# Altium PCB Brd_3_Golden_Arduino_Layout.PcbDoc
Units mil, origin at the board's own origin, x right, y up, seen from the top; angles counter-clockwise.
Board outline 2750 x 2700 mil, 2 copper layers (Top Layer, Bottom Layer), stack 61.756 mil thick; 49 components, 41 nets, 223 pads, 60 vias.
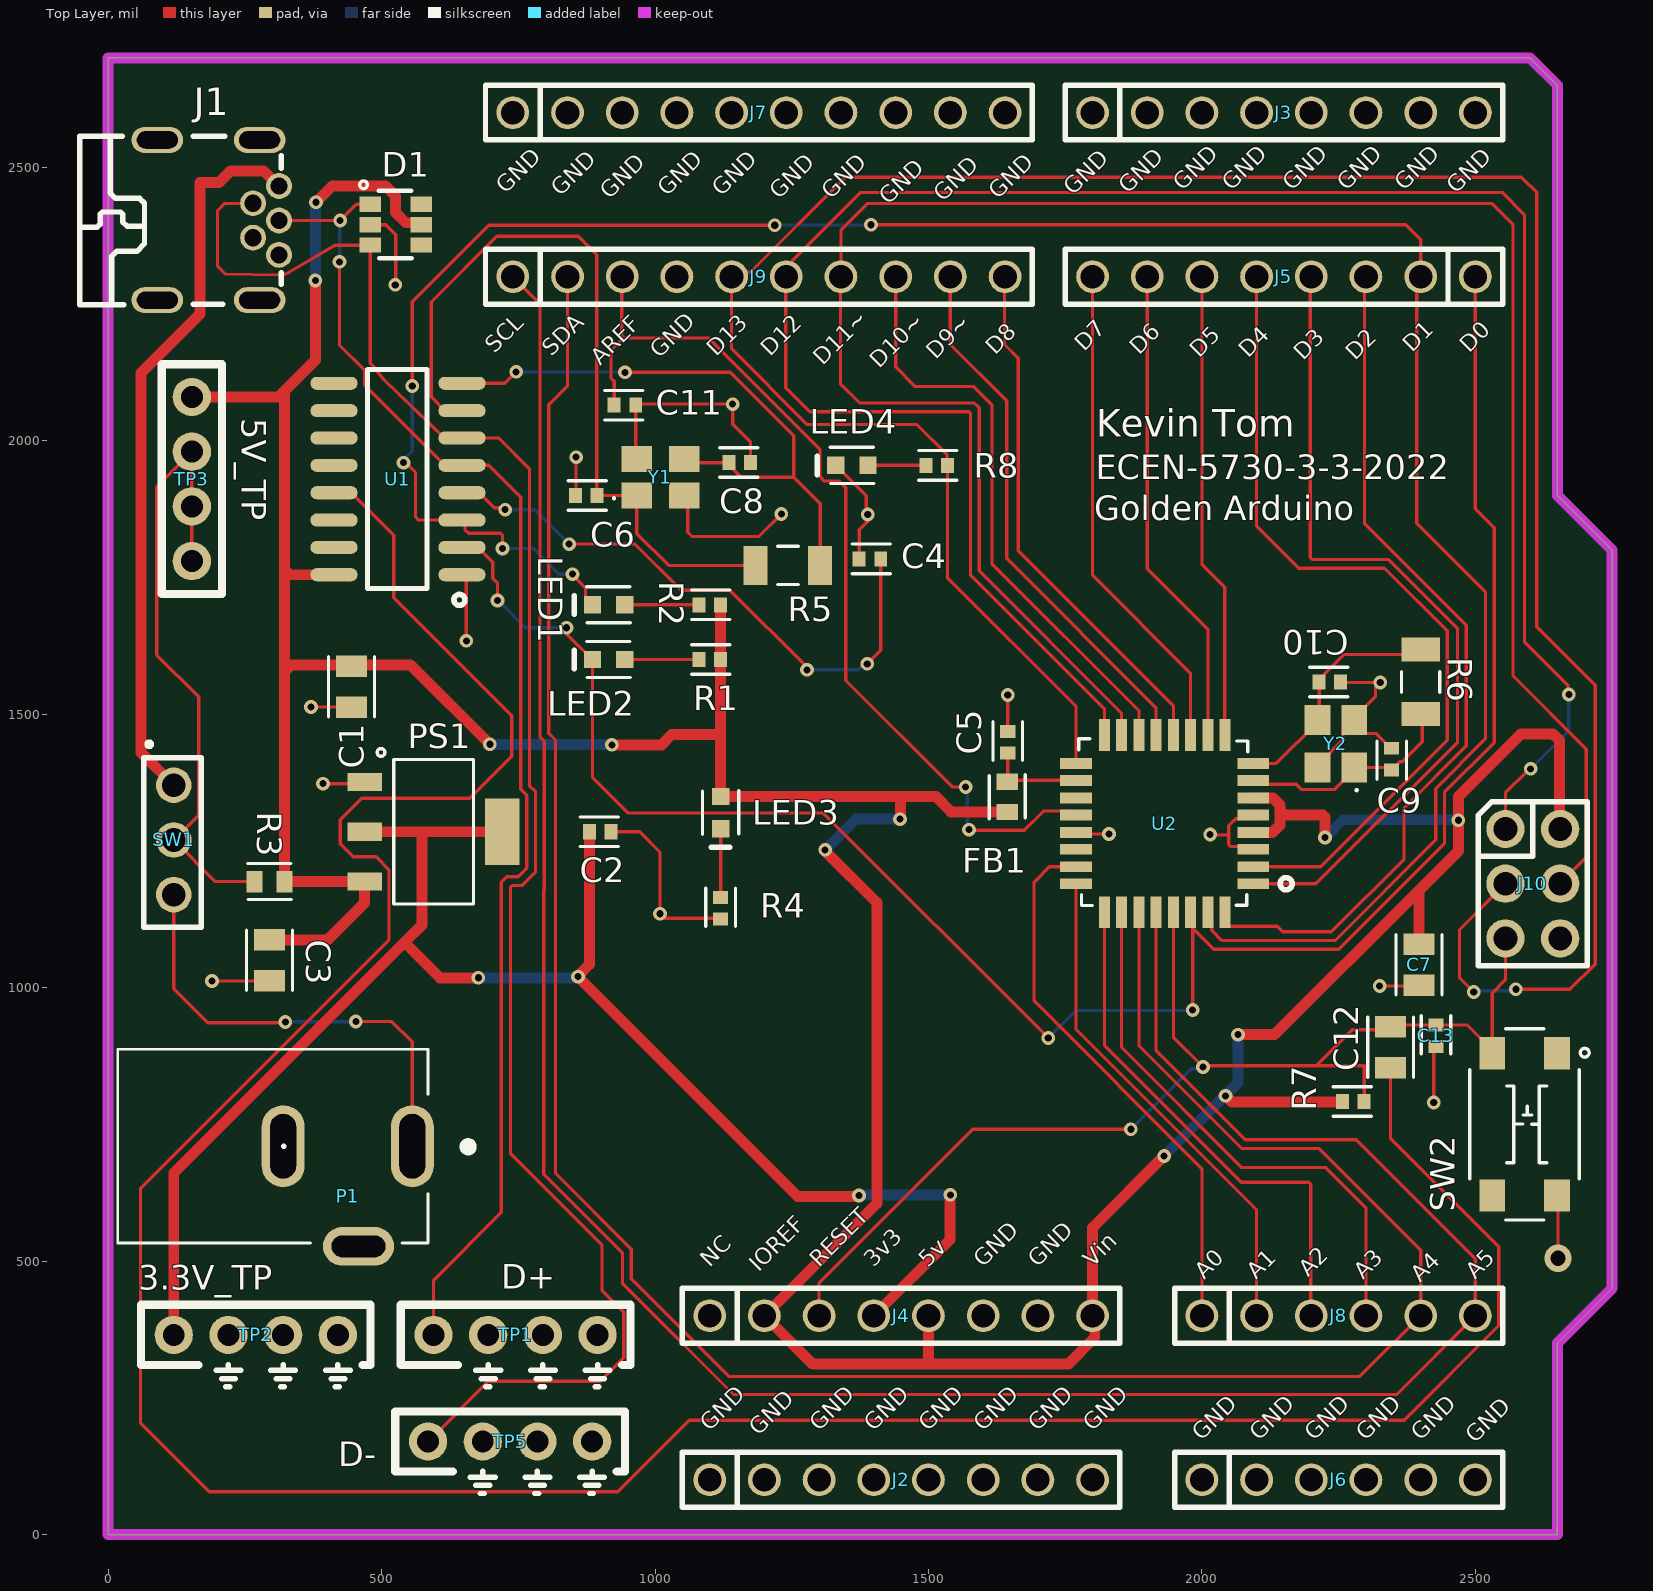
[diagram p0: Top Layer view]
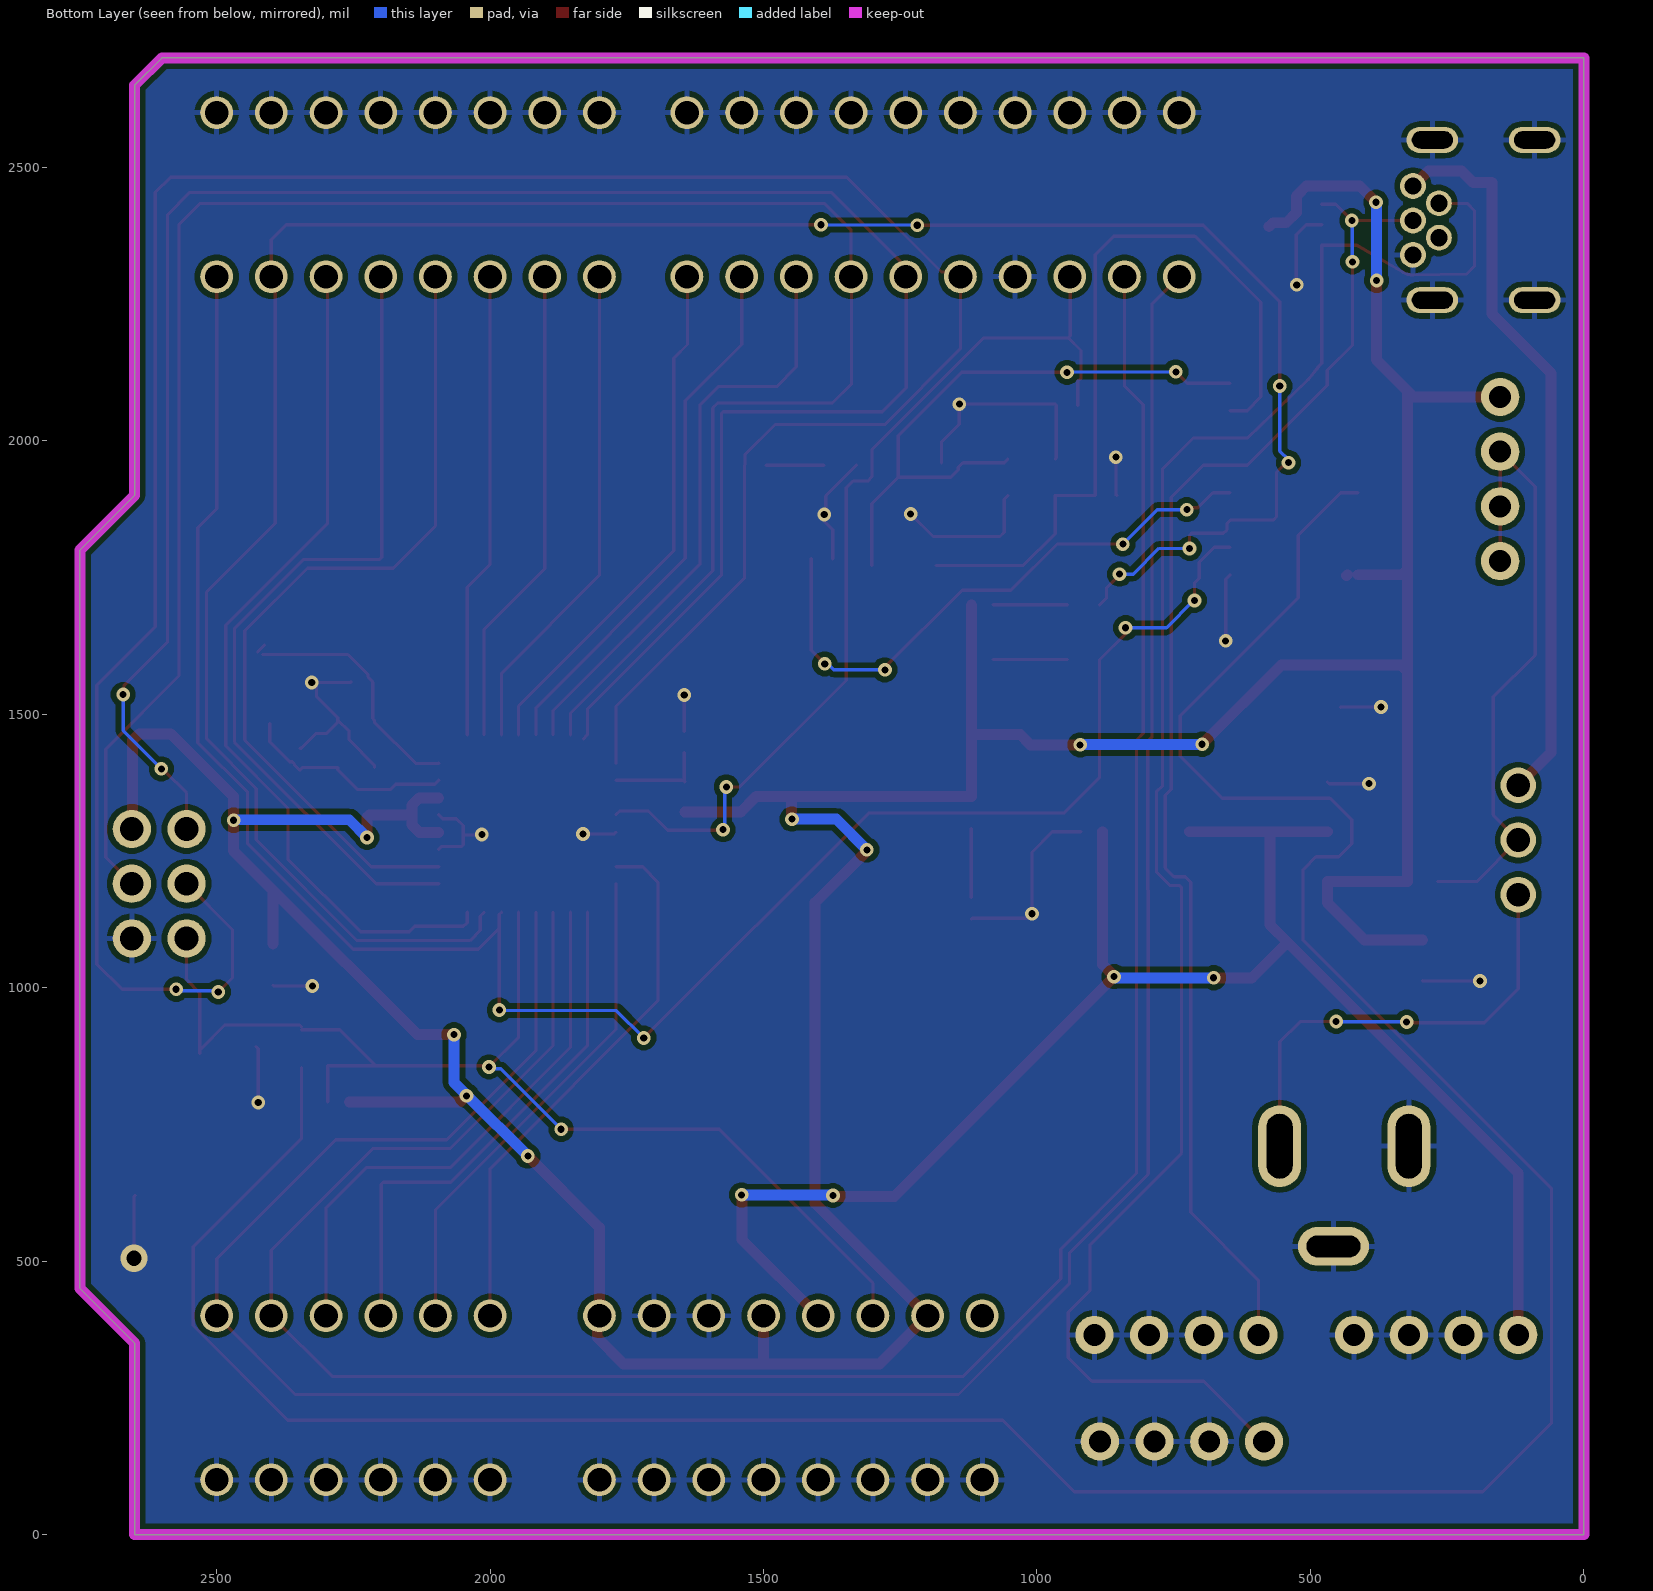
[diagram p1: Bottom Layer view, seen from below]
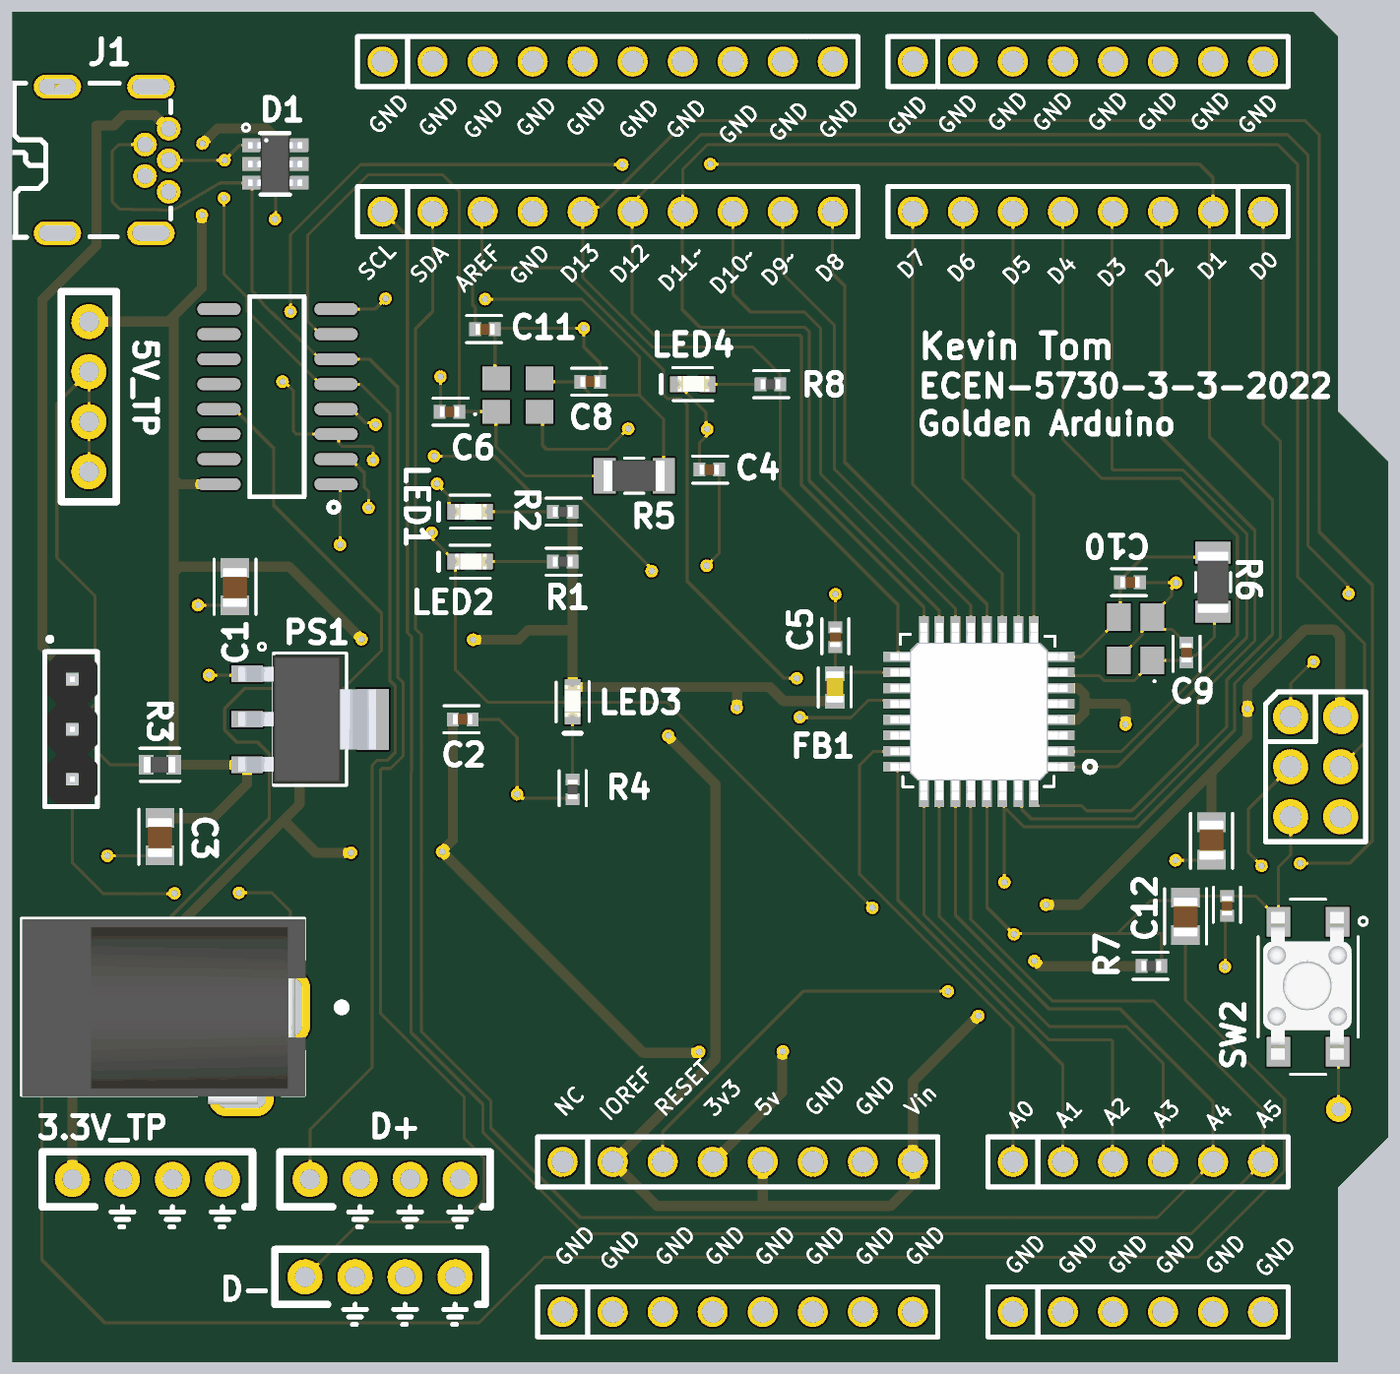
[diagram p2: 3D render of the assembled board from above, using the file's embedded part models]

## Layer stack, top to bottom
Top Solder: solder mask 1, SM-001, Dk 4
Top Layer: signal copper 1.378
Dielectric 1: core 59, Core-043, Dk 4.3
Bottom Layer: signal copper 1.378
Bottom Solder: solder mask 1, SM-001, Dk 4

## Board outline
0,0 0,2700 2600,2700 2650,2650 2650,1900 2750,1800 2750,450 2650,350 2650,0

## Design rules (kind name [scope] priority, off if disabled: settings)
BoardOutlineClearance [All] p1: gap=10 ignorepadtopadclearanceinfootprint=FALSE except(0: Arc-SplitContinuation Track-SplitContinuation SMDPad-SplitContinuation THPad-SplitContinuation Via-SplitContinuation Fill-SplitContinuation Poly-SplitContinuation Region-SplitContinuation Text-SplitContinuation)
Clearance [All] p1: gap=10 ignorepadtopadclearanceinfootprint=FALSE except(0: Arc-Hole Track-Hole SMDPad-Hole THPad-Hole Via-Hole Fill-Hole Poly-Hole Region-Hole Text-Hole)
PlaneClearance [All] p1: clearance=10
PlaneConnect [All] p1: planeconnectstyle=Direct reliefexpansion=20 reliefentries=4 reliefconductorwidth=10 reliefairgap=10
PolygonConnect [All] p1: thpad.connectstyle=Relief thpad.reliefconductorwidth=10 thpad.reliefentries=4 thpad.polygonreliefangle="90 Angle" thpad.airgapwidth=10 smdpad.connectstyle=Direct smdpad.reliefconductorwidth=10 smdpad.reliefentries=4 smdpad.polygonreliefangle="90 Angle" smdpad.airgapwidth=10 via.connectstyle=Direct via.reliefconductorwidth=10 via.reliefentries=4 via.polygonreliefangle="90 Angle" via.airgapwidth=10
RoutingVias [All] p1: holewidth=13 width=25 viastyle="Through Hole" minholewidth=13 minwidth=25 maxholewidth=60 maxwidth=80
SolderMaskExpansion [All] p1: expansion=4 istentingtop=FALSE
UnRoutedNet [All] p1: checkbadconnections=TRUE
Width "Schematic Width Constraint_1" [InNet('POWER_3.3V')] p1: maxlimit=20 minlimit=20 preferedwidth=20 minimp=50.000000 maximp=50.000000 favimp=50.000000
Width "Schematic Width Constraint" [InNet('+5')] p2: maxlimit=20 minlimit=20 preferedwidth=20 minimp=50.000000 maximp=50.000000 favimp=50.000000
Width [All] p3: maxlimit=100 minlimit=6 preferedwidth=6 minimp=50.000000 maximp=50.000000 favimp=50.000000
27 further rules are at their usual default settings.

## Components (designator, comment, footprint, x,y, rotation, side; value= is the part's Value field where it differs from the comment)
C1 "22uF" 0805_Passive_Capaciitor 445,1550 r90 top
C2 "10uF" 0402_Passive_Capacitor 900,1285 r180 top
C3 "22uF" 0805_Passive_Capaciitor 295,1050 r90 top
C4 "1uF" 0402_Passive_Capacitor 1393,1784 r0 top
C5 "10uF" 0402_Passive_Capacitor 1645,1449 r90 top
C6 "22pF" 0402_Passive_Capacitor 874,1900 r0 top
C7 "22uF" 0805_Passive_Capaciitor 2397,1042 r270 top
C8 "22pF" 0402_Passive_Capacitor 1155,1960 r180 top
C9 "22pF" 0402_Passive_Capacitor 2347,1418 r270 top
C10 "22pF" 0402_Passive_Capacitor 2234,1559 r180 top
C11 "10uF" 0402_Passive_Capacitor 945,2065 r180 top
C12 "22uF" 0805_Passive_Capaciitor 2345,891 r90 top
C13 "1uF" 0402_Passive_Capacitor 2428,912 r90 top
D1 "SRV05-4-P-T7" TVS 525,2395 r0 top value="TVS DIODE 5.5V 6TSOP"
FB1 "FB_10uH_0603" 0603_PASSIVE_Capacitor 1644,1349 r90 top
J1 "USB Mini" USB_MINI_B 201.25,2403.55 r270 top value="USB mini B"
J2 "PPTC081LFBN-RC" 8_PIN_ARDUINO_100MIL 1100,100 r0 top value=Female
J3 "PPTC081LFBN-RC" 8_PIN_ARDUINO_100MIL 1800,2600 r0 top value=Female
J4 "PPTC081LFBN-RC" 8_PIN_ARDUINO_100MIL 1100,400 r0 top value=Female
J5 "PPTC081LFBN-RC" 8_PIN_ARDUINO_100MIL 2500,2300 r180 top value=Female
J6 "PPTC061LFBN-RC" 6_PIN_ARDUINO_100mil 2000,100 r0 top value=Female
J7 "PPTC101LFBN-RC" 10_PIN_ARDUINO_100MIL 740,2600 r0 top value=Female
J8 "PPTC061LFBN-RC" 6_PIN_ARDUINO_100mil 2000,400 r0 top value=Female
J9 "PPTC101LFBN-RC" 10_PIN_ARDUINO_100MIL 740,2300 r0 top value=Female
J10 "NRPN032PAEN-RC" ICSP 2555,1290 r0 top
LED1 "KT-0603R" LED_0603 915,1700 r180 top value=Green
LED2 "KT-0603R" LED_0603 915,1600 r180 top value=Green
LED3 "KT-0603R" LED_0603 1120,1320 r270 top value=Red
LED4 "KT-0603R" LED_0603 1360,1955 r180 top value=Blue
P1 "Power Jack" Power_Jack 556.22,710 r180 top value="CONN PWR JACK 2X5.5MM SOLDER"
PS1 "AMS1117-3.3" LDO 595,1285 r270 top value="IC REG LINEAR 3.3V 800MA SOT223"
R1 "1k" 0402_Passive_Resistor 1100,1600 r0 top value="1K Ohm"
R2 "1k" 0402_Passive_Resistor 1100,1700 r0 top value="1K Ohm"
R3 "500m" 0603_PASSIVE_Resistor 295,1194 r0 top value="500 mOhm"
R4 "1k" 0402_Passive_Resistor 1120,1145 r90 top value="1K Ohm"
R5 "1M" 1206_Passive_Resitor 1243,1772 r0 top value="1M Ohm"
R6 "1M" 1206_Passive_Resitor 2400,1559 r90 top value="1M Ohm"
R7 "10k" 0402_Passive_Resistor 2277,792 r180 top value=10KOhm
R8 "1k" 0402_Passive_Resistor 1515,1955 r0 top value="1K Ohm"
SW1 "PREC003SAAN-RC" 3_PIN_100mil 120,1370 r270 top value="CONN HEADER VERT 3POS 2.54MM"
SW2 "TL3305AF160QG" Switch_JLC 2590,750 r270 top
TP1 "D+" TP10x_Probe 745,365 r0 top
TP2 "3.3V_TP" TP10x_Probe 270,365 r0 top
TP3 "5V_TP" TP10x_Floating 153,1930 r270 top
TP5 "D-" TP10x_Probe 735,170 r0 top
U1 "CH340G" "USB to serial" 530,1930 r90 top value="USB to Serial"
U2 "ATMEGA328P-ANR" ATMega328P 1930,1300 r0 top value="IC MCU 8BIT 32KB FLASH 32TQFP"
Y1 "X322512MSB4SI" "Crystal resonator" 1010,1935 r0 top value=12MHz
Y2 "X322516MLB4SI" "Crystal resonator" 2243,1446 r90 top value=16MHz

## Footprints (in the part's own frame and the unit in brackets; to place one, negate y for a bottom-side part, rotate by r counter-clockwise, add the part's x,y. Pads: shape width x height; smd on the part's side, far side on the other; paste and mask are expansions set on the pad)
3_PIN_100mil [mm]
  round 1.65 hole 1.1: 1(0,0) 2(2.54,0) 3(5.08,0)
  silkscreen extent -2,-1.4 6.6,1.27, body extent -1.14,-1.27 6.48,1.27, height 8.38
6_PIN_ARDUINO_100mil [mil]
  round 60 hole 43.31: 1(0,0) 2(100,0) 3(200,0) 4(300,0) 5(400,0) 6(500,0)
  silkscreen extent -50,-50 550,50
8_PIN_ARDUINO_100MIL [mil]
  round 60 hole 43.31: 1(0,0) 2(100,0) 3(200,0) 4(300,0) 5(400,0) 6(500,0) 7(600,0) 8(700,0)
  silkscreen extent -50,-50 750,50
10_PIN_ARDUINO_100MIL [mil]
  round 60 hole 43.31: 1(0,0) 2(100,0) 3(200,0) 4(300,0) 5(400,0) 6(500,0) 7(600,0) 8(700,0) 9(800,0) 10(900,0)
  silkscreen extent -50,-50 950,50
0402_Passive_Capacitor [mm] "Reference: https://www.worthingtonassembly.com/perfect-0402-footprint"
  rect 0.6x0.7 smd mask+0: 1(-0.5,0) 2(0.5,0)
  silkscreen extent -0.84,-0.69 0.94,0.69, body extent -0.5,-0.27 0.5,0.28, height 0.5
0402_Passive_Resistor [mm] "Reference: https://www.worthingtonassembly.com/perfect-0402-footprint"
  rect 0.6x0.7 smd mask+0: 1(-0.5,0) 2(0.5,0)
  silkscreen extent -0.84,-0.69 0.94,0.69, body extent -0.49,-0.25 0.51,0.25, height 0.4
0603_PASSIVE_Capacitor [mm] "Reference: http://livepartlibrary.com/fpdimensions.html"
  rect 0.75x1 smd mask+0: 1(-0.7,0) 2(0.7,0)
  silkscreen extent -1.02,-0.84 1.02,0.84, body extent -0.79,-0.45 0.81,0.45, height 0.79
0603_PASSIVE_Resistor [mm] "Reference: http://livepartlibrary.com/fpdimensions.html"
  rect 0.75x1 smd mask+0: 1(-0.7,0) 2(0.7,0)
  silkscreen extent -1.02,-0.84 1.02,0.84, body extent -0.81,-0.4 0.79,0.4, height 0.55
0805_Passive_Capaciitor [mm] "Reference: http://livepartlibrary.com/fpdimensions.html"
  rect 1x1.45 smd mask+0: 1(-0.95,0) 2(0.95,0)
  silkscreen extent -1.4,-1.07 1.4,1.07, body extent -1.04,-0.62 0.96,0.63, height 1.4
1206_Passive_Resitor [mil]
  rect 44x71 smd: 1(-59,0) 2(59,0)
  silkscreen extent -19,-35 19,35, body extent -61,-31 61,31, height 26
ATMega328P [mil]
  rect 58x20 smd mask+1: 1(163.93,-110) 2(163.93,-79) 3(163.93,-47) 4(163.93,-16) 5(163.93,16) 6(163.93,47) 7(163.93,79) 8(163.93,110) 17(-160.07,110) 18(-160.07,79) 19(-160.07,47) 20(-160.07,16) 21(-160.07,-16) 22(-160.07,-47) 23(-160.07,-79) 24(-160.07,-110)
  rect 20x58 smd mask+1: 9(111.93,162) 10(80.93,162) 11(48.93,162) 12(17.93,162) 13(-14.07,162) 14(-45.07,162) 15(-77.07,162) 16(-108.07,162) 25(-108.07,-162) 26(-77.07,-162) 27(-45.07,-162) 28(-14.07,-162) 29(17.93,-162) 30(48.93,-162) 31(80.93,-162) 32(111.93,-162)
  silkscreen extent -155,-150 235,155, body extent -175,-177 179,177, height 46
"Crystal resonator" [mil]
  rect 55.11x47.24 smd: 1(-43.3,-35.43) 2(43.31,-35.43) 3(43.32,31.5) 4(-43.3,31.5)
  silkscreen extent -87,-42 -83,-38, body extent -65,-47 65,47, height 31
ICSP [mil]
  round 70 hole 43.31: 1(0,0) 2(0,-100) 3(0,-200) 4(100,0) 5(100,-100) 6(100,-200)
  silkscreen extent -50,-250 150,50
LDO [mil]
  rect 33x63 smd: 1(-91,-126) 2(0,-126) 3(91,-126)
  rect 122x63 smd: 4(0,126)
  silkscreen extent -152,-103 132,73, body extent -128,-144 128,132, height 73
LED_0603 [mm]
  rect 0.8x0.8 smd: 1(-0.75,0) 2(0.75,0)
  silkscreen extent -1.02,-0.84 1.6,0.84, body extent -0.84,-0.41 0.76,0.39, height 0.55
Power_Jack [mm]
  oval 2x3.8 hole 1.2 slot 3 at 90 deg: 1(0,0) 2(6,0)
  oval 3.3x1.8 hole 1 slot 2.5 at 0 deg: 3(2.5,4.65)
  silkscreen extent -2.79,-4.5 13.68,4.5, body extent -0.76,-4.45 13.64,4.95, height 11.49
Switch_JLC [mm]
  rect 1.5x1.2 smd: 1(-3.3,1.5) 2(3.3,1.5) 3(-3.3,-1.5) 4(3.3,-1.5)
  silkscreen extent -4.44,-2.54 4.45,3, body extent -3.8,-2.29 3.7,2.21, height 3.7
TP10x_Floating [mil] "Small Probs footprint"
  round 70 hole 40: 1(-150,0) 2(-50,0) 3(50,0) 4(150,0)
  silkscreen extent -210,-55 210,55
TP10x_Probe [mil] "Small Probs footprint"
  round 70 hole 40: 1(-150,0) 2(-50,0) 2(50,0) 2(150,0)
  silkscreen extent -210,-95 210,55
TVS [mm]
  rect 1x0.7 smd mask+0.025: 1(-1.162,0.95) 2(-1.162,0) 3(-1.162,-0.95) 4(1.2,-0.95) 5(1.2,0) 6(1.2,0.95)
  silkscreen extent -1.65,-1.55 0.76,2.03, body extent -1.37,-1.44 1.38,1.46, height 1.1
"USB to serial" [mil]
  oval 24x86.61 smd: 1(-175,-117) 2(-125,-117) 3(-75,-117) 4(-25,-117) 5(25,-117) 6(75,-117) 7(125,-117) 8(175,-117) 9(175,117) 10(125,117) 11(75,117) 12(25,117) 13(-25,117) 14(-75,117) 15(-125,117) 16(-175,117)
  silkscreen extent -231,-122 201,56
USB_MINI_B [mm]
  round 1.2 hole 0.8: 1(-1.58,2.826) 2(-0.78,1.622) 3(0.02,2.826) 4(0.82,1.622) 5(1.62,2.826)
  oval 1.2x2.4 hole 0.8 slot 1.9 at 90 deg: 6(-3.72,1.924) 7(3.72,1.924) 8(-3.72,-2.826) 9(3.72,-2.826)
  silkscreen extent -3.89,-6.42 3.93,2.93

## Part data
C1 C3 C7 C12: library part C_22uF_0805, "MULTILAYER CERAMIC CAPACITORS MLCC - SMD/SMT 22UF 25V 0805 ROHS", LCSC Part#=C45783, MFR Part #=CL21A226MAQNNNE, Datasheet=https://datasheet.lcsc.com/szlcsc/Samsung-Electro-Mechanics-CL21A226MAQNNNE_C45783.pdf, Type=Basic
C2 C5 C11: library part C_10uF_0402, "10uF ±20% 6.3V X5R 0402 Multilayer Ceramic Capacitors MLCC - SMD/SMT RoHS", LCSC Part#=C15525, MFR Part #=CL05A106MQ5NUNC, Datasheet=https://datasheet.lcsc.com/lcsc/1810191215_Samsung-Electro-Mechanics-CL05A106MQ5NUNC_C15525.pdf, Type=Basic
C4 C13: library part C_1uF_0402, "MULTILAYER CERAMIC CAPACITORS MLCC - SMD/SMT 1UF 25V 0402 ROHS", LCSC Part#=C52923, MFR Part #=CL05A105KA5NQNC, Datasheet=https://datasheet.lcsc.com/szlcsc/Samsung-Electro-Mechanics-CL05A105KA5NQNC_C52923.pdf, Type=Basic
C6 C8 C9 C10: library part C_22pF_0402, "MULTILAYER CERAMIC CAPACITORS MLCC - SMD/SMT 22PF 50V 0402 ROHS", LCSC Part#=C1555, MFR Part #=0402CG220J500NT, Datasheet=https://datasheet.lcsc.com/szlcsc/Guangdong-Fenghua-Advanced-Tech-0402CG220J500NT_C1555.pdf, Type=Basic
D1: library part D_TVS_Diode, "TVS SOT-23-6 ROHS", LCSC Part#=C85364, Datasheet=https://datasheet.lcsc.com/szlcsc/ProTek-Devices-SRV05-4-P-T7_C85364.pdf, MFR Part #=SRV05-4-P-T7, Type=Basic
FB1: "10 uH, 30 Q, 1.85 Ohm Series Resistance, 17MHz Self Resonant Frequency,Inductor , SMD 0603, 3 Amps rated current", LCSC Part#=C1035, MFR Part #=SDFL1608S100KTF, Datasheet=https://datasheet.lcsc.com/szlcsc/Sunlord-SDFL1608S100KTF_C1035.pdf, Type=Basic
J1: library part J_USB_B_Mini, "Through Hole USB Connectors RoHS", LCSC Part#=C46398, MFR Part #=920-462A2021D10102, Datasheet=https://datasheet.lcsc.com/szlcsc/2103081233_Jing-Extension-of-the-Electronic-Co-920-462A2021D10102_C46398.pdf, Type=Extended
J2 J3 J4 J5: library part JF_8_PIN_FEMALE_ARDUINO, "8 Position Header Connector 0.100\" (2.54mm) Through Hole Tin", LCSC Part#=C27438, Digikey Link=https://www.digikey.com/product-detail/en/PPTC081LFBN-RC/S7006-ND/810147/?itemSeq=304982354, Digikey Part=S7006-ND, Type=Extended
J6 J8: library part JF_6_PIN_FEMALE_ARDUINO, "6 Position Header Connector 0.100\" (2.54mm) Through Hole Tin", LCSC Part#=C40877, Digikey Link=https://www.digikey.com/product-detail/en/PPTC061LFBN-RC/S7004-ND/810145/?itemSeq=304982353, Digikey Part=S7004-ND, Type=Extended
J7 J9: library part JF_10_PIN_FEMALE_ARDUINO, "10 Position Header Connector 0.100\" (2.54mm) Through Hole Tin", LCSC Part#=C225507, Digikey Link=https://www.digikey.com/product-detail/en/PPTC101LFBN-RC/S7008-ND/810149/?itemSeq=304982352, Digikey Part=S7008-ND, Type=Extended
J10: library part J_ICSP, "Connector Header Through Hole 6 position 0.079\" (2.00mm)", LCSC Part#=C124384, Digikey Link=https://www.digikey.com/product-detail/en/NRPN032PAEN-RC/S5801-03-ND/804955/?itemSeq=304982355, Digikey Part=S5801-03-ND, Type=Extended
LED1 LED2: library part LED_GREEN_0603, "LIGHT EMITTING DIODES (LED) GREEN 520~535NM 112~258MCD@20MA TOP VIEW 0603 ROHS", LCSC Part#=C72043, MFR Part #=19-217/GHC-YR1S2/3T, Type=Basic
LED3: library part LED_RED_0603, "LIGHT EMITTING DIODES (LED) RED 520~625NM 90~100MCD@20MA TOP VIEW 0603 ROHS", LCSC Part#=C2286, Datasheet=https://datasheet.lcsc.com/szlcsc/Everlight-Elec-19-217-BHC-ZL1M2RY-3T_C72041.pdf, MFR Part #=KT-0603R, Type=Basic
LED4: library part LED_BLUE_0603, "LIGHT EMITTING DIODES (LED) BLUE 465~475NM 11.5~28.5MCD@5MA TOP VIEW 0603 ROHS", LCSC Part#=C72041, MFR Part #=19-217/BHC-ZL1M2RY/3T, Type=Basic
P1: library part "P_Power Jack", "Power Barrel Connector Jack 2.10mm ID (0.083\"), 5.50mm OD (0.217\") Through Hole, Right Angle", LCSC Part#=C136744, Digikey Link=https://www.digikey.com/product-detail/en/PJ-102A/CP-102A-ND/275425/?itemSeq=304982367, Digikey Part=CP-102A-ND, Type=Extended
PS1: library part PS_AMS_LDO_3v3, "LOW DROPOUT REGULATORS(LDO) POSITIVE FIXED 1.3V @ 800MA 15V 3.3V 1A SOT-223 ROHS", LCSC Part#=C6186, MFR Part #=AMS1117-3.3, Type=Basic
R1 R2 R4 R8: library part R_1K_0402, "1 kOhms chip resistor SURFACE MOUNT 1KOHMS ±1% 1/16W 0402 ROHS", LCSC Part#=C11702, MFR Part #=0402WGF1001TCE, Datasheet=https://datasheet.lcsc.com/szlcsc/Uniroyal-Elec-0402WGF1001TCE_C11702.pdf, Type=Basic
R3: library part R_500m_0603, "CHIP RESISTOR - SURFACE MOUNT 0.5OHMS ±1% 1/10W 0603 ROHS", LCSC Part#=C45312, MFR Part #=0603WAF500LT5E, Datasheet=https://datasheet.lcsc.com/szlcsc/SUP-MRMF3216-1206-LR005FTN_C76290.pdf, Type=Extended
R5 R6: library part R_1M_1206, "CHIP RESISTOR - SURFACE MOUNT 1MOHMS ±1% 1/4W 1206 ROHS", LCSC Part#=C17927, Digikey Link=https://www.digikey.com/product-detail/en/RMCF1206JT1M00/RMCF1206JT1M00CT-ND/1942830/?itemSeq=304982358, Digikey Part="Number RMCF1206JT1M00CT-ND", Type=Basic
R7: library part R_10KOhm_0402, "CHIP RESISTOR - SURFACE MOUNT 10KOHMS ±1% 1/16W 0402 ROHS", LCSC Part#=C25744, MFR Part #=0402WGF1002TCE, Datasheet=https://datasheet.lcsc.com/szlcsc/Uniroyal-Elec-0402WGF1002TCE_C25744.pdf, Type=Basic
SW1: library part SW_3Pin_100mil_Switch, "Connector Header Through Hole 3 position 0.100\" (2.54mm)", LCSC Part#=C429954, Digikey Link=https://www.digikey.com/product-detail/en/PREC003SAAN-RC/S1012EC-03-ND/2774851/?itemSeq=304982371, Digikey Part=S1012EC-03-ND, Type=Extended
SW2: library part SW_Push_Button_JLC, "Tactile Switch SPST-NO Top Actuated Surface Mount", LCSC Part#=C174049, MFR Part #=C174049, Type=Extended
TP1 TP2 TP5: library part TP_10x_Probe, "Test Point 300 mil centers"
TP3: library part TP_10x_Floating, "Test Point 300 mil centers"
U1: library part U_USBtoSerial, "Transceiver USB 2.0 2Mbps SOP-16_150mil USB ICs RoHS", LCSC Part#=C14267, Datasheet=https://datasheet.lcsc.com/lcsc/2008191806_WCH-Jiangsu-Qin-Heng-CH340G_C14267.pdf, MFR Part #=CH340G, Type=Basic
U2: library part U_ATMega328P, "AVR AVR® ATmega Microcontroller IC 8-Bit 20MHz 32KB (16K x 16) FLASH 32-TQFP (7x7)", LCSC Part#=C14877, MFR Part #=ATMEGA328P-AU, Digikey Link=https://www.digikey.com/product-detail/en/ATMEGA328P-ANR/ATMEGA328P-ANRCT-ND/2774230/?itemSeq=304982365, Type=Basic
Y1: library part X_12MHz_Res, "SMD Crystal Resonators 12MHz ±10ppm SMD-3225_4P RoHS", LCSC Part#=C9002, Datasheet=https://datasheet.lcsc.com/szlcsc/Yangxing-Tech-X322512MSB4SI_C9002.pdf, MFR Part #=X322512MSB4SI, Type=Basic
Y2: library part X_16Mhz_Res, "±10ppm 16000000Hz -40℃~85℃ 贴片无源晶振 60Ω 9pF SMD3225-4P Crystals ROHS", LCSC Part#=C13738, MFR Part #=X322516MLB4SI, Type=Basic

## Via types
v1: diameter 25, hole 13, Top Layer to Bottom Layer, 59 vias
v2: diameter 50, hole 28, Top Layer to Bottom Layer, 1 vias

## Nets (pads, with @x,y where several pads share a name; then routed paths per layer and width w, separated by ;. In a path a pad name is that pad's centre, name@x,y a point inside that pad or via, vN(x,y) a via of type N, cw(c..) or ccw(c..) an arc to the next point about the centre after c; other vN are vias at no path point)
16MHz_OSC1: C9.2 R6.1 U2.7 Y2.1 | length 392.7
  Top Layer w6: U2.7 2100.93,1372 2172.64,1372 2182.5,1362.14 2241.81,1362.14 2278.43,1398.76 Y2.1 2342.62,1402.7 C9.2 2348.97,1398.31 2357.78,1407.13 2357.78,1409.09 2361.56,1412.87 2366.16,1412.87 2403,1449.71 R6.1@2403,1483
16MHz_OSC2: C10.2 R6.2 U2.8 Y2.3 | length 466
  Top Layer w6: U2.8@2094,1410.07 U2.8 2136.12,1410 2211.5,1485.38 Y2.3 2214.31,1492.13 C10.2 2223.13,1567.81 2223.13,1572.42 2259.71,1609 R6.2@2416,1609 ; R6.2@2413,1626 R6.2@2425.16,1613.84
+5: C1.2 C3.2 C7.1 D1.5 FB1.1 J4.2 J4.5 J4.8 J10.4 LED3.1 PS1.3 R1.2 R2.2 R3.2 R7.2 TP3.1 U1.16 U2.4 U2.6 | length 8416.5
  Top Layer w20: TP3.1 311.44,2080 322.56,2091.12 ; C3.2 401.4,1087.4 469,1155 PS1.3 R3.2 322.56,1578.28 ; v1(379,2293) 379,2147.56 322.56,2091.12 ; v1(380,2436) 410.18,2466.18 507.2,2466.18 525.74,2447.64 525.74,2417.16 544.27,2398.62 568.62,2398.62 D1.5 D1.5@575.87,2391.38 ; U1.16 332.56,1755 322.56,1765 ; U1.16@432.46,1755 U1.16@434.31,1753.15 ; v1(698,1445) 553,1590 334.27,1590 322.56,1578.28 ; v1(921,1444) 1011.6,1444 1030.6,1463 1119.84,1463 ; R2.2 R1.2 1119.84,1599.84 1119.84,1463 ; v1(1311,1252) 1311,1250 1405.5,1155.5 1405.5,605.5 J4.2 1288,312 1499,312 ; v1(1448,1308) 1448.96,1308.96 1448.96,1348.48 1450,1349.53 ; J4.5 1500,313 1499,312 ; FB1.1 1541.56,1321.44 1513.47,1349.53 1450,1349.53 ; v1(1931,692) 1800,561 J4.8 1804,396 1804,360 1756,312 1499,312 ; v1(2043,802) 2044.35,802 2055.35,791 R7.2@2257.31,791 ; v1(2066,914) 2133,914 2393,1174 ; U2.4 2129.21,1284 2142.93,1297.72 2142.93,1324 ; U2.6 2130.21,1347 2142.93,1334.28 2142.93,1324 ; v1(2225,1274.5) 2225,1312 2221,1316 2150.93,1316 2142.93,1324 ; C7.1 2397,1170 2393,1174 ; J10.4 2654,1291 2654,1452.3 2642.28,1464.02 2583.54,1464.02 2469,1349.48 v1(2469,1306) 2469,1250 2393,1174 ; 322.56,1578.28 322.56,1765 ; 322.56,1765 322.56,2091.12 ; 1119.84,1463 1119.84,1349.68 LED3.1 1450,1349.53
  Bottom Layer w20: v1(379,2293) 379,2433.65 379.04,2433.69 379.04,2434.96 v1@379,2435 ; v1(698,1445) 698.5,1444.5 920.5,1444.5 v1(921,1444) ; v1(1311,1252) 1367,1308 v1(1448,1308) ; v1(1931,692) 2041,802 v1(2043,802) 2043,803.35 2066,826.35 v1(2066,914) ; v1(2225,1274.5) 2257.5,1307 2464,1307 2464.04,1306.96 2468.04,1306.96 v1(2469,1306)
AD0: J8.1 U2.23 | length 1008.7
  Top Layer w6: U2.23 1721,1221 1693,1193 1693,976 2000,669 J8.1
AD1: J8.2 U2.24 | length 926.7
  Top Layer w6: U2.24 1769.93,923.44 2100,593.37 J8.2
AD2: J8.3 U2.25 | length 966.9
  Top Layer w6: U2.25 1821.93,894.07 2072,644 2195.49,644 2199,640.49 2199,401 J8.3
AD3: J8.4 U2.26 | length 1013
  Top Layer w6: U2.26 1852.93,891.07 2073,671 2226.37,671 2300,597.37 J8.4
AD4/SDA: J8.5 J9.2 U2.27 | length 4507.1
  Top Layer w6: J9.2 840,2100.36 805.5,2065.86 805.5,1465.32 818,1452.82 818,660.25 956.41,521.84 956.41,467.59 1135,289 2289,289 J8.5 2400,520 2214,706 2072.37,706 1884.93,893.44 U2.27
AD5/SCL: J8.6 J9.1 U2.28 | length 4727
  Top Layer w6: J9.1 789.5,2250.5 789.5,1458.69 797.5,1450.69 797.5,1179.19 796.5,1178.19 796.5,659.13 940.41,515.21 940.41,459.09 1143.5,256 2356,256 J8.6 2500,504 2282,722 2079,722 1915.93,885.07 U2.28
AREF: C11.2 J9.3 U2.20 | length 1740.5
  Top Layer w6: C11.2 925.31,2108.62 919.5,2114.44 919.5,2164.99 942.51,2188 ; J9.3 939,2299 939,2191.51 942.51,2188 ; v1(1568,1367) 1543.12,1367 1348.5,1561.62 1348.5,1914.34 1336.59,1926.25 1309.34,1926.25 1301.72,1933.87 1301.72,1983.64 1097.37,2188 942.51,2188 ; v1@1577.51,1288 1675.53,1288 1710.53,1323 1762.93,1323 U2.20
  Bottom Layer w6: v1(1568,1367) 1571,1364 1571,1291.94 v1(1574,1288.94)
CH340G_DTR: C12.1 U1.13 | length 5564.6
  Top Layer w6: U1.13 444.31,1905 522,1827.31 522,1713.26 738,1497.26 738,1423 661.5,1346.5 464.12,1346.5 424.5,1306.88 424.5,1263.12 448.12,1239.5 489.88,1239.5 513.5,1215.88 513.5,1086.79 59,632.29 59,204 185,78 932,78 1063,209 2369.81,209 2543,382.19 2543,526 2345,724 C12.1
CH340G_RX: J5.2 LED1.2 U1.3 U2.31 | length 4467.8
  Top Layer w6: v1(540,1960) 544,1960 562,1942 562,1861 568,1855 U1.3 652.49,1849.51 652.49,1837.51 659,1831 717.49,1831 721,1827.49 v1(721,1803) ; v1(556,2100) 556,2254 619,2317 620.76,2318.76 696,2394 v1(1219,2394) ; v1(849,1756) 849,1755 872.72,1731.28 872.72,1712.75 LED1.2 ; v1(1395,2395) 2372.86,2395 2400,2367.86 J5.2 2393,2293 2393,1849 2518.5,1723.5 2518.5,1454.73 2427.5,1363.73 2427.5,1270.13 2243.37,1086 2036.54,1086 2017.93,1104.62 2017.93,1131 U2.31
  Bottom Layer w6: v1(540,1960) 540,1965.14 556,1981.14 v1(556,2100) ; v1(721,1803) 777,1803 824,1756 v1(849,1756) ; v1(1219,2394) 1219.5,2394.5 1394.5,2394.5 v1(1395,2395)
CH340G_TX: J5.1 LED2.2 U1.2 U2.30 | length 3718.4
  Top Layer w6: U1.2 675.99,1805 703.31,1777.69 703.31,1748.48 712,1739.79 v1(712,1708) ; v1(838,1658) 838,1647.47 LED2.2 885.47,1384.53 950.78,1319.22 1307.78,1319.22 v1(1719,908) ; U2.30 1983,1133.93 v1(1983,959) ; 1985.93,1105.62 2021.54,1070 2249.99,1070 2443.5,1263.51 2443.5,1357.11 2534.5,1448.11 2534.5,1841 2500,1875.5 J5.1
  Bottom Layer w6: v1(712,1708) 713,1707 714,1707 763,1658 v1(838,1658) ; v1(1719,908) 1769,958 1982,958 v1(1983,959)
D8: J9.10 U2.12 | length 966.4
  Top Layer w6: J9.10 1639,2299 1639,2176 1664,2151 1664,1799 1947.93,1515.07 U2.12
D9: J9.9 U2.13 | length 993.7
  Top Layer w6: J9.9 1540,2176 1643,2073 1643,1785 1915.93,1512.07 U2.13
D10: J9.8 U2.14 | length 1085
  Top Layer w6: J9.8 1440,2135 1476,2099 1583,2099 1616,2066 1616,1775 1884.93,1506.07 U2.14
Data+: D1.1 J1.3 TP1.1 U1.5 | length 2489.1
  Top Layer w6: J1.3 v1(424.2,2402.76) 454.06,2432.62 479.01,2432.62 D1.1 ; v1(423,2327) 423,2175.07 469.31,2128.76 469.31,2101.39 615.69,1955 U1.5 696.21,1955 754.31,1896.9 754.31,1362.58 765.5,1351.38 765.5,1218.62 749.52,1202.63 728.94,1202.63 719,1192.69 719,589 595,465 TP1.1
  Bottom Layer w6: v1(423,2327) 423.6,2327.6 423.6,2402.16 v1(424.2,2402.76)
Data-: D1.3 J1.2 TP5.1 U1.6 | length 3225.6
  Top Layer w6: J1.2 264.86,2434 213,2434 200,2421 200,2319 214.09,2304.91 311.85,2303.15 ccw(c312.51,2339.77) 330.99,2308.15 415.6,2357.6 D1.3 479.23,2298 479.23,2143.95 479.23,2141.46 485.31,2135.39 503.06,2113.11 ccw(c523,2129) 505.37,2110.58 615.69,2005 618.18,2005 U1.6 714,2005 770.31,1948.69 770.31,1369.2 781.5,1358.01 781.5,1211.99 756.15,1186.63 739.09,1186.63 735.57,1183.12 735.57,697.43 903,530 903,446.76 943,406.76 943,323.51 899.49,280 695,280 TP5.1
GND: C1.1 C2.1 C3.1 C4.1 C5.2 C6.1 C7.2 C8.1 C9.1 C10.1 C11.1 C13.1 D1.2 J1.5 J1.6 J1.7 J1.8 J1.9 J2.1 J2.2 J2.3 J2.4 J2.5 J2.6 J2.7 J2.8 J3.1 J3.2 J3.3 J3.4 J3.5 J3.6 J3.7 J3.8 J4.6 J4.7 J6.1 J6.2 J6.3 J6.4 J6.5 J6.6 J7.1 J7.2 J7.3 J7.4 J7.5 J7.6 J7.7 J7.8 J7.9 J7.10 J9.4 J10.6 LED4.2 P1.2 P1.3 PS1.1 R4.1 SW2.2 TP1.2 TP2.2 TP5.2 U1.1 U2.3 U2.5 U2.21 Y1.2 Y1.4 Y2.2 Y2.4 | length 2750.2
  Top Layer w6: v1(190,1012) 294.4,1012 C3.1 ; v1(371,1513) 444.6,1513 C1.1 ; v1(393,1373) 466,1373 PS1.1 ; D1.2 507.92,2395 526,2376.92 526,2286 v1(525,2285) ; U1.1 655,1747 v1(655,1634) ; C6.1 855.69,1901.37 v1(855.69,1970) ; C2.1 972,1285 1009,1248 v1(1009,1135) 1017,1127 1118.32,1127 R4.1 ; Y1.4 964.68,1968.51 C11.1 966.68,2067 v1(1142,2067) 1142,2030 1174.68,1997.32 C8.1 ; Y1.2 1060,1892.88 1060,1832.51 1067.61,1824.9 1189.9,1824.9 v1(1231,1866) ; LED4.2 1386.47,1899 1386.47,1867.53 v1(1389,1865) 1389,1853.09 1373.32,1837.41 C4.1 ; C5.2 v1(1645,1535) ; U2.21 1772.93,1281 v1(1830,1281) ; v1(2015,1280) 2016.01,1278.99 2049,1278.99 ; U2.3 2088.93,1258 2052.51,1258 2049,1261.51 2049,1278.99 ; U2.5 2086.93,1309 2061.54,1309 2049,1296.46 2049,1278.99 ; Y2.4 2211.5,1406.63 2257.81,1452.94 2257.81,1468.69 Y2.2 ; C10.1 2254.68,1558 v1(2326,1558) 2317.58,1549.58 2317.58,1532.4 2278.43,1493.25 Y2.2 ; v1(2325,1003) 2395.4,1003 C7.2 ; C9.1 2345.03,1437.68 2317.96,1464.76 2299.05,1464.76 2278.43,1485.38 Y2.2 ; v1(2424,790) 2424,888.32 C13.1 ; SW2.2 2651,618.13 v2(2651,505)
MISO: J9.6 J10.1 U2.16 | length 3897.9
  Top Layer w6: U2.16@1828.93,1455 U2.16 1821.93,1509.07 1577,1754 1577,2049.49 1573.49,2053 1283,2053 1239,2097 1239,2299 1250.33,2310.33 1250.33,2328.33 1376,2454 2549,2454 2589.79,2413.21 2589.79,1632.21 2669.3,1552.7 2669.3,1537.7 v1(2671,1536) ; J10.1 2555,1356 v1@2594,1395
  Bottom Layer w6: v1(2601,1400) 2671,1470 v1(2671,1536)
MOSI: J9.7 J10.5 U2.15 | length 3805.1
  Top Layer w6: U2.15 1852.93,1502.07 1593,1762 1593,2060 1584,2069 1374,2069 1339,2104 1339,2299 J9.7 1340,2385 1389,2434 2530,2434 2569,2395 2569,1569.83 2703,1435.83 2703,1238 J10.5
NetC4_2: C4.2 U1.4 | length 1084.7
  Top Layer w6: U1.4 678.31,1905 705.67,1877.64 722.36,1877.64 v1(726,1874) ; v1(843,1811) 963.37,1811 1047.59,1726.78 1136.88,1726.78 1278,1585.66 v1(1278,1581) ; v1(1388,1592) 1412.69,1616.69 C4.2
  Bottom Layer w6: v1(726,1874) 780,1874 v1(843,1811) ; v1(1278,1581) 1371.86,1581 1382.86,1592 v1(1388,1592)
NetC5_1: C5.1 FB1.2 U2.18 | length 178.7
  Top Layer w6: FB1.2 FB1.2@1645,1377.56 ; C5.1 FB1.2@1645,1377.56 ; U2.18 1646.44,1379 FB1.2@1645,1377.56
NetJ5_3: J5.3 U2.32 | length 1599.4
  Top Layer w6: U2.32 2041.93,1119 2048.93,1112 2137.83,1112 2147.83,1102 2236.74,1102 2369.62,1234.88 2369.62,1328.48 2483.5,1442.36 2483.5,1662.64 2297.14,1849 2297.14,2297.14 J5.3
NetJ5_4: J5.4 U2.1 | length 1525.7
  Top Layer w6: U2.1 2208.51,1190 2467.5,1448.99 2467.5,1656.01 2340.51,1783 2201.51,1783 2198,1786.51 2198,2298 J5.4
NetJ5_5: J5.5 U2.2 | length 1534.1
  Top Layer w6: U2.2 2216.88,1221 2448.5,1452.62 2448.5,1652.38 2333.88,1767 2177,1767 2100,1844 J5.5
NetJ5_6: J5.6 U2.9 | length 855.4
  Top Layer w6: J5.6 2000,1774 2041.93,1732.07 U2.9
NetJ5_7: J5.7 U2.10 | length 883.9
  Top Layer w6: J5.7 1900,1766 2010.93,1655.07 U2.10
NetJ5_8: J5.8 U2.11 | length 912.1
  Top Layer w6: J5.8 1800,1754 1978.93,1575.07 U2.11
NetLED1_1: LED1.1 R2.1 | length 135.8
  Top Layer w6: LED1.1 R2.1
NetLED2_1: LED2.1 R1.1 | length 135.8
  Top Layer w6: LED2.1 R1.1
NetLED3_2: LED3.2 R4.2 | length 125.8
  Top Layer w6: R4.2 LED3.2
NetLED4_1: LED4.1 R8.1 | length 105.8
  Top Layer w6: LED4.1 R8.1
NetP1_1: P1.1 SW1.3 | length 840.8
  Top Layer w6: SW1.3 120,998.26 182.26,936 323,936 v1(324,937) ; v1(453,938) 519,938 556.22,900.78 P1.1
  Bottom Layer w6: v1(324,937) 324.5,937.5 452.5,937.5 v1(453,938)
NetR3_1: R3.1 SW1.2 TP3.2 TP3.3 TP3.4 | length 1165.9
  Top Layer w6: TP3.4 TP3.3 TP3.2 89,1916 89,1608.16 165.48,1531.68 165.48,1315.48 SW1.2 196,1194 R3.1
POWER_3.3V: C2.2 J4.4 PS1.2 PS1.4 TP2.1 | length 3106.2
  Top Layer w20: TP2.1 120,660.77 542.12,1082.88 ; PS1.2 574,1285 ; v1(677,1018) 607,1018 542.12,1082.88 ; PS1.4 574,1285 ; C2.2 880.31,1042.67 859,1021.35 v1(859,1020) 1261,618 1371,618 v1(1373,620) ; J4.4 1539.04,539.04 1539.04,620.04 v1(1540,621) ; 542.12,1082.88 574,1114.76 574,1285
  Bottom Layer w20: v1(677,1018) 855.65,1018 857.65,1020 v1(859,1020) ; v1(1373,620) 1373.5,620.5 1539.5,620.5 v1(1540,621)
RESET: C12.2 C13.2 J4.3 J10.3 R7.1 SW2.3 U2.29 | length 2182.3
  Top Layer w6: J4.3 1300,460 1581,741 v1(1870,741) ; U2.29 1947.93,909.07 v1(2002,855) 2003.96,856.96 2208.96,856.96 ; R7.1@2297,791.15 2297,856.96 2208.96,856.96 ; C12.2@2345,922.87 2274.87,922.87 2208.96,856.96 ; C12.2 2348.28,931.69 2485.09,931.69 SW2.3@2530.95,885.83 ; SW2.3 SW2.3@2530.95,885.83 ; J10.3 2555,1014.06 2530.95,990.01 SW2.3@2530.95,885.83
  Bottom Layer w6: v1(1870,741) 1980.5,851.5 1998.5,851.5 v1(2002,855)
SCK: J9.5 J10.2 R8.2 U2.17 | length 4769.5
  Top Layer w6: U2.17 1769.93,1514.07 1534.69,1749.31 R8.2 1534,1955.69 1534,1974.64 1479.05,2029.58 1278.41,2029.58 1140,2167.99 J9.5 1148.58,2308.58 1174.58,2308.58 1348,2482 2584,2482 2612,2454 2612,1660 2719,1553 2719,1043 2673,997 v1(2574,997) ; v1(2497,992) 2471,1018 2471,1106 J10.2
  Bottom Layer w6: v1(2497,992) 2499.5,994.5 2571.5,994.5 v1(2574,997)
UART_OSC1: C6.2 R5.1 U1.7 Y1.1 | length 1431.4
  Top Layer w6: U1.7 615.69,2055 592.45,2078.24 590.69,2080 590.69,2253.69 711,2374 860,2374 893.69,2340.32 C6.2 966.27,1900 Y1.1 966.7,1830.3 1025,1772 R5.1
UART_OSC2: C8.2 R5.2 U1.8 Y1.3 | length 1137.6
  Top Layer w6: U1.8 725,2105 v1(746,2126) ; v1(945,2125) 1137.74,2125 1253.52,2009.22 1253.52,1933.22 ; Y1.3 1059.82,1960 C8.2 1144.13,1951.19 1144.13,1946.58 1157.49,1933.22 1253.52,1933.22 ; R5.2 1302,1884.74 1253.52,1933.22
  Bottom Layer w6: v1(746,2126) 746.5,2125.5 944.5,2125.5 v1(945,2125)
USB_5V: J1.1 SW1.1 | length 1335.3
  Top Layer w6: J1.1@306.26,2472 J1.1
  Top Layer w20: SW1.1 60,1430 60,2124 168,2232 168,2472 202.56,2472 223.56,2493 284.47,2493 J1.1@305.47,2472
pads on no net: D1.4 D1.6 J1.4 J4.1 SW2.1 SW2.4 U1.9 U1.10 U1.11 U1.12 U1.14 U1.15 U2.19 U2.22

## Polygon pours and split planes (outlines as drawn)
GND on Bottom Layer "GND_L02_P000" (solid, pour order 0): 0,0 0,2700 2600,2700 2650,2650 2650,1900 2750,1800 2750,450 2650,350 2650,0

## Keep-outs
Keep-Out Layer:
  the board outline again, w20

## Silkscreen, mask and mechanical layers (free items; w line width, h text height)
Top Overlay:
  text "Kevin Tom" at 1807,2007 h50
  text "ECEN-5730-3-3-2022" at 1806,1930 h45
  text "Golden Arduino" at 1803,1855 h45

## Text inside footprints (layer, text, board x,y; h text height)
J2: Top Overlay "GND" at 1800,187.07 h30 r45; Top Overlay "GND" at 1700,187.07 h30 r45; Top Overlay "GND" at 1600,187.07 h30 r45; Top Overlay "GND" at 1500,187.07 h30 r45; Top Overlay "GND" at 1400,187.07 h30 r45; Top Overlay "GND" at 1300,187.07 h30 r45; Top Overlay "GND" at 1190,178.39 h30 r45; Top Overlay "GND" at 1100,187.07 h30 r45
J3: Top Overlay "GND" at 2465,2450 h30 r45; Top Overlay "GND" at 2370,2455 h30 r45; Top Overlay "GND" at 2265,2455 h30 r45; Top Overlay "GND" at 2165,2455 h30 r45; Top Overlay "GND" at 2055,2455 h30 r45; Top Overlay "GND" at 1965,2455 h30 r45; Top Overlay "GND" at 1865,2450 h30 r45; Top Overlay "GND" at 1765,2447.07 h30 r45
J4: Top Overlay "Vin" at 1800,487.07 h30 r45; Top Overlay "GND" at 1700,487.07 h30 r45; Top Overlay "GND" at 1600,487.07 h30 r45; Top Overlay "5v" at 1500,487.07 h30 r45; Top Overlay "3v3" at 1400,487.07 h30 r45; Top Overlay "RESET" at 1300,487.07 h30 r45; Top Overlay "IOREF" at 1190,478.39 h30 r45; Top Overlay "NC" at 1100,487.07 h30 r45
J5: Top Overlay "D7" at 1785,2162 h30 r45; Top Overlay "D6" at 1885,2155 h30 r45; Top Overlay "D5" at 1995,2150 h30 r45; Top Overlay "D4" at 2085,2150 h30 r45; Top Overlay "D3" at 2185,2145 h30 r45; Top Overlay "D2" at 2280,2145 h30 r45; Top Overlay "D1" at 2385,2160 h30 r45; Top Overlay "D0" at 2489,2159.07 h30 r45
J6: Top Overlay "GND" at 2500,165 h30 r45; Top Overlay "GND" at 2400,170 h30 r45; Top Overlay "GND" at 2300,170 h30 r45; Top Overlay "GND" at 2205,170 h30 r45; Top Overlay "GND" at 2000,170 h30 r45; Top Overlay "GND" at 2105,170 h30 r45
J7: Top Overlay "GND" at 727.24,2450 h30 r45; Top Overlay "GND" at 827.24,2445 h30 r45; Top Overlay "GND" at 917.24,2440 h30 r45; Top Overlay "GND" at 1022.24,2445 h30 r45; Top Overlay "GND" at 1122.24,2445 h30 r45; Top Overlay "GND" at 1227.24,2440 h30 r45; Top Overlay "GND" at 1322.24,2440 h30 r45; Top Overlay "GND" at 1427.24,2430 h30 r45; Top Overlay "GND" at 1527.24,2435 h30 r45; Top Overlay "GND" at 1627.24,2440 h30 r45
J8: Top Overlay "A5" at 2499.68,464.88 h30 r45; Top Overlay "A4" at 2399.68,459.88 h30 r45; Top Overlay "A3" at 2294.68,464.88 h30 r45; Top Overlay "A2" at 2194.68,469.88 h30 r45; Top Overlay "A0" at 2004.68,464.88 h30 r45; Top Overlay "A1" at 2099.68,464.88 h30 r45
J9: Top Overlay "SCL" at 707,2158 h30 r45; Top Overlay "SDA" at 811,2153 h30 r45; Top Overlay "AREF" at 900,2136 h30 r45; Top Overlay "GND" at 1009,2149 h30 r45; Top Overlay "D13" at 1112,2153 h30 r45; Top Overlay "D12" at 1211,2153 h30 r45; Top Overlay "D11~" at 1307,2136 h30 r45; Top Overlay "D10~" at 1410,2131 h30 r45; Top Overlay "D9~" at 1513,2147 h30 r45; Top Overlay "D8" at 1622,2155 h30 r45